# Altium PCB TFT_Adapter_Board_拼版.PcbDoc (part 8 of 9)
Units mm, origin at the board's own origin, x right, y up, seen from the top; angles counter-clockwise.
Board outline 137 x 166.56 mm, 2 copper layers (Top Layer, Bottom Layer); 80 components, 32 nets, 2615 pads, 0 vias.
Unrouted connection lines stored in the file: 1248.
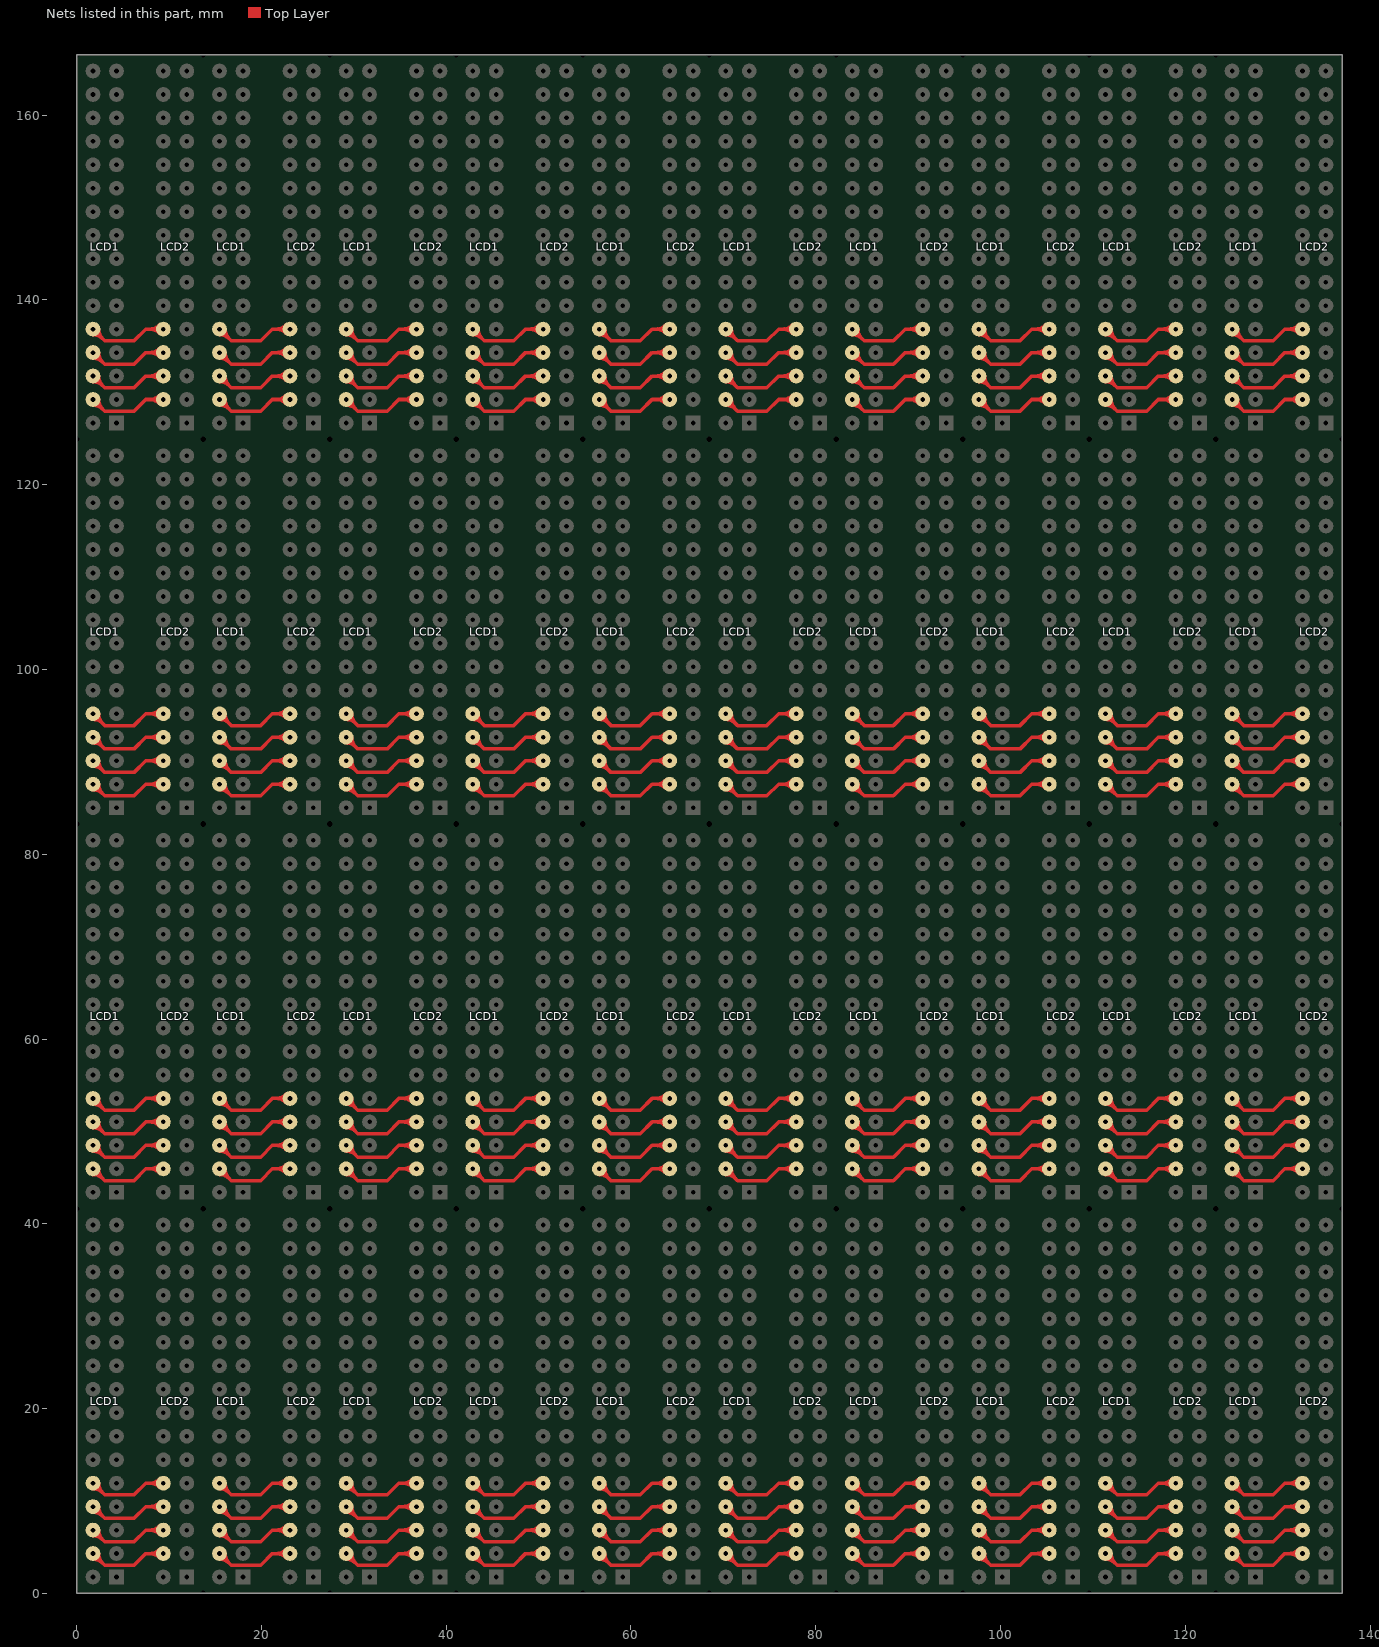
[diagram p8: the nets of this part, all layers, seen from the top]

## Nets (pads, with @x,y where several pads share a name; then routed paths per layer and width w, separated by ;. In a path a pad name is that pad's centre, name@x,y a point inside that pad or via, vN(x,y) a via of type N, cw(c..) or ccw(c..) an arc to the next point about the centre after c; other vN are vias at no path point) (continued)
NetLCD1_28: LCD1.28 LCD2.28 | length 531.8
  Top Layer w0.381: LCD1.28@1.77,11.321 cw(c1.77,9.849) 2.81,10.89 cw(c3.851,11.93) LCD1.28@2.379,11.93 ; LCD1.28@1.77,11.93 3.04,10.66 6.215,10.66 7.485,11.93 LCD2.28@9.39,11.93 ; LCD1.28@1.77,52.96 cw(c1.77,51.489) 2.81,52.53 cw(c3.851,53.57) LCD1.28@2.379,53.57 ; LCD1.28@1.77,53.57 3.04,52.3 6.215,52.3 7.485,53.57 LCD2.28@9.39,53.57 ; LCD1.28@1.77,94.6 cw(c1.77,93.129) 2.81,94.17 cw(c3.851,95.21) LCD1.28@2.379,95.21 ; LCD1.28@1.77,95.21 3.04,93.94 6.215,93.94 7.485,95.21 LCD2.28@9.39,95.21 ; LCD1.28@1.77,136.24 cw(c1.77,134.769) 2.81,135.81 cw(c3.851,136.85) LCD1.28@2.379,136.85 ; LCD1.28@1.77,136.85 3.04,135.58 6.215,135.58 7.485,136.85 LCD2.28@9.39,136.85 ; LCD2.28@8.959,11.499 ccw(c7.919,10.459) 7.919,11.93 ccw(c7.919,13.401) LCD2.28@8.959,12.361 ; LCD2.28@8.959,53.139 ccw(c7.919,52.099) 7.919,53.57 ccw(c7.919,55.041) LCD2.28@8.959,54.001 ; LCD2.28@8.959,94.779 ccw(c7.919,93.739) 7.919,95.21 ccw(c7.919,96.681) LCD2.28@8.959,95.641 ; LCD2.28@8.959,136.419 ccw(c7.919,135.379) 7.919,136.85 ccw(c7.919,138.321) LCD2.28@8.959,137.281 ; LCD1.28@15.47,11.321 cw(c15.47,9.849) 16.51,10.89 cw(c17.551,11.93) LCD1.28@16.079,11.93 ; LCD1.28@15.47,11.93 16.74,10.66 19.915,10.66 21.185,11.93 LCD2.28@23.09,11.93 ; LCD1.28@15.47,52.96 cw(c15.47,51.489) 16.51,52.53 cw(c17.551,53.57) LCD1.28@16.079,53.57 ; LCD1.28@15.47,53.57 16.74,52.3 19.915,52.3 21.185,53.57 LCD2.28@23.09,53.57 ; LCD1.28@15.47,94.6 cw(c15.47,93.129) 16.51,94.17 cw(c17.551,95.21) LCD1.28@16.079,95.21 ; LCD1.28@15.47,95.21 16.74,93.94 19.915,93.94 21.185,95.21 LCD2.28@23.09,95.21 ; LCD1.28@15.47,136.24 cw(c15.47,134.769) 16.51,135.81 cw(c17.551,136.85) LCD1.28@16.079,136.85 ; LCD1.28@15.47,136.85 16.74,135.58 19.915,135.58 21.185,136.85 LCD2.28@23.09,136.85 ; LCD2.28@22.659,11.499 ccw(c21.619,10.459) 21.619,11.93 ccw(c21.619,13.401) LCD2.28@22.659,12.361 ; LCD2.28@22.659,53.139 ccw(c21.619,52.099) 21.619,53.57 ccw(c21.619,55.041) LCD2.28@22.659,54.001 ; LCD2.28@22.659,94.779 ccw(c21.619,93.739) 21.619,95.21 ccw(c21.619,96.681) LCD2.28@22.659,95.641 ; LCD2.28@22.659,136.419 ccw(c21.619,135.379) 21.619,136.85 ccw(c21.619,138.321) LCD2.28@22.659,137.281 ; LCD1.28@29.17,11.321 cw(c29.17,9.849) 30.21,10.89 cw(c31.251,11.93) LCD1.28@29.779,11.93 ; LCD1.28@29.17,11.93 30.44,10.66 33.615,10.66 34.885,11.93 LCD2.28@36.79,11.93 ; LCD1.28@29.17,52.96 cw(c29.17,51.489) 30.21,52.53 cw(c31.251,53.57) LCD1.28@29.779,53.57 ; LCD1.28@29.17,53.57 30.44,52.3 33.615,52.3 34.885,53.57 LCD2.28@36.79,53.57 ; LCD1.28@29.17,94.6 cw(c29.17,93.129) 30.21,94.17 cw(c31.251,95.21) LCD1.28@29.779,95.21 ; LCD1.28@29.17,95.21 30.44,93.94 33.615,93.94 34.885,95.21 LCD2.28@36.79,95.21 ; LCD1.28@29.17,136.24 cw(c29.17,134.769) 30.21,135.81 cw(c31.251,136.85) LCD1.28@29.779,136.85 ; LCD1.28@29.17,136.85 30.44,135.58 33.615,135.58 34.885,136.85 LCD2.28@36.79,136.85 ; LCD2.28@36.359,11.499 ccw(c35.319,10.459) 35.319,11.93 ccw(c35.319,13.401) LCD2.28@36.359,12.361 ; LCD2.28@36.359,53.139 ccw(c35.319,52.099) 35.319,53.57 ccw(c35.319,55.041) LCD2.28@36.359,54.001 ; LCD2.28@36.359,94.779 ccw(c35.319,93.739) 35.319,95.21 ccw(c35.319,96.681) LCD2.28@36.359,95.641 ; LCD2.28@36.359,136.419 ccw(c35.319,135.379) 35.319,136.85 ccw(c35.319,138.321) LCD2.28@36.359,137.281 ; LCD1.28@42.87,11.321 cw(c42.87,9.849) 43.91,10.89 cw(c44.951,11.93) LCD1.28@43.479,11.93 ; LCD1.28@42.87,11.93 44.14,10.66 47.315,10.66 48.585,11.93 LCD2.28@50.49,11.93 ; LCD1.28@42.87,52.96 cw(c42.87,51.489) 43.91,52.53 cw(c44.951,53.57) LCD1.28@43.479,53.57 ; LCD1.28@42.87,53.57 44.14,52.3 47.315,52.3 48.585,53.57 LCD2.28@50.49,53.57 ; LCD1.28@42.87,94.6 cw(c42.87,93.129) 43.91,94.17 cw(c44.951,95.21) LCD1.28@43.479,95.21 ; LCD1.28@42.87,95.21 44.14,93.94 47.315,93.94 48.585,95.21 LCD2.28@50.49,95.21 ; LCD1.28@42.87,136.24 cw(c42.87,134.769) 43.91,135.81 cw(c44.951,136.85) LCD1.28@43.479,136.85 ; LCD1.28@42.87,136.85 44.14,135.58 47.315,135.58 48.585,136.85 LCD2.28@50.49,136.85 ; LCD2.28@50.059,11.499 ccw(c49.019,10.459) 49.019,11.93 ccw(c49.019,13.401) LCD2.28@50.059,12.361 ; LCD2.28@50.059,53.139 ccw(c49.019,52.099) 49.019,53.57 ccw(c49.019,55.041) LCD2.28@50.059,54.001 ; LCD2.28@50.059,94.779 ccw(c49.019,93.739) 49.019,95.21 ccw(c49.019,96.681) LCD2.28@50.059,95.641 ; LCD2.28@50.059,136.419 ccw(c49.019,135.379) 49.019,136.85 ccw(c49.019,138.321) LCD2.28@50.059,137.281 ; LCD1.28@56.57,11.321 cw(c56.57,9.849) 57.61,10.89 cw(c58.651,11.93) LCD1.28@57.179,11.93 ; LCD1.28@56.57,11.93 57.84,10.66 61.015,10.66 62.285,11.93 LCD2.28@64.19,11.93 ; LCD1.28@56.57,52.96 cw(c56.57,51.489) 57.61,52.53 cw(c58.651,53.57) LCD1.28@57.179,53.57 ; LCD1.28@56.57,53.57 57.84,52.3 61.015,52.3 62.285,53.57 LCD2.28@64.19,53.57 ; LCD1.28@56.57,94.6 cw(c56.57,93.129) 57.61,94.17 cw(c58.651,95.21) LCD1.28@57.179,95.21 ; LCD1.28@56.57,95.21 57.84,93.94 61.015,93.94 62.285,95.21 LCD2.28@64.19,95.21 ; LCD1.28@56.57,136.24 cw(c56.57,134.769) 57.61,135.81 cw(c58.651,136.85) LCD1.28@57.179,136.85 ; LCD1.28@56.57,136.85 57.84,135.58 61.015,135.58 62.285,136.85 LCD2.28@64.19,136.85 ; LCD2.28@63.759,11.499 ccw(c62.719,10.459) 62.719,11.93 ccw(c62.719,13.401) LCD2.28@63.759,12.361 ; LCD2.28@63.759,53.139 ccw(c62.719,52.099) 62.719,53.57 ccw(c62.719,55.041) LCD2.28@63.759,54.001 ; LCD2.28@63.759,94.779 ccw(c62.719,93.739) 62.719,95.21 ccw(c62.719,96.681) LCD2.28@63.759,95.641 ; LCD2.28@63.759,136.419 ccw(c62.719,135.379) 62.719,136.85 ccw(c62.719,138.321) LCD2.28@63.759,137.281 ; LCD1.28@70.27,11.321 cw(c70.27,9.849) 71.31,10.89 cw(c72.351,11.93) LCD1.28@70.879,11.93 ; LCD1.28@70.27,11.93 71.54,10.66 74.715,10.66 75.985,11.93 LCD2.28@77.89,11.93 ; LCD1.28@70.27,52.96 cw(c70.27,51.489) 71.31,52.53 cw(c72.351,53.57) LCD1.28@70.879,53.57 ; LCD1.28@70.27,53.57 71.54,52.3 74.715,52.3 75.985,53.57 LCD2.28@77.89,53.57 ; LCD1.28@70.27,94.6 cw(c70.27,93.129) 71.31,94.17 cw(c72.351,95.21) LCD1.28@70.879,95.21 ; LCD1.28@70.27,95.21 71.54,93.94 74.715,93.94 75.985,95.21 LCD2.28@77.89,95.21 ; LCD1.28@70.27,136.24 cw(c70.27,134.769) 71.31,135.81 cw(c72.351,136.85) LCD1.28@70.879,136.85 ; LCD1.28@70.27,136.85 71.54,135.58 74.715,135.58 75.985,136.85 LCD2.28@77.89,136.85 ; LCD2.28@77.459,11.499 ccw(c76.419,10.459) 76.419,11.93 ccw(c76.419,13.401) LCD2.28@77.459,12.361 ; LCD2.28@77.459,53.139 ccw(c76.419,52.099) 76.419,53.57 ccw(c76.419,55.041) LCD2.28@77.459,54.001 ; LCD2.28@77.459,94.779 ccw(c76.419,93.739) 76.419,95.21 ccw(c76.419,96.681) LCD2.28@77.459,95.641 ; LCD2.28@77.459,136.419 ccw(c76.419,135.379) 76.419,136.85 ccw(c76.419,138.321) LCD2.28@77.459,137.281 ; LCD1.28@83.97,11.321 cw(c83.97,9.849) 85.01,10.89 cw(c86.051,11.93) LCD1.28@84.579,11.93 ; LCD1.28@83.97,11.93 85.24,10.66 88.415,10.66 89.685,11.93 LCD2.28@91.59,11.93 ; LCD1.28@83.97,52.96 cw(c83.97,51.489) 85.01,52.53 cw(c86.051,53.57) LCD1.28@84.579,53.57 ; LCD1.28@83.97,53.57 85.24,52.3 88.415,52.3 89.685,53.57 LCD2.28@91.59,53.57 ; LCD1.28@83.97,94.6 cw(c83.97,93.129) 85.01,94.17 cw(c86.051,95.21) LCD1.28@84.579,95.21 ; LCD1.28@83.97,95.21 85.24,93.94 88.415,93.94 89.685,95.21 LCD2.28@91.59,95.21 ; LCD1.28@83.97,136.24 cw(c83.97,134.769) 85.01,135.81 cw(c86.051,136.85) LCD1.28@84.579,136.85 ; LCD1.28@83.97,136.85 85.24,135.58 88.415,135.58 89.685,136.85 LCD2.28@91.59,136.85 ; LCD2.28@91.159,11.499 ccw(c90.119,10.459) 90.119,11.93 ccw(c90.119,13.401) LCD2.28@91.159,12.361 ; LCD2.28@91.159,53.139 ccw(c90.119,52.099) 90.119,53.57 ccw(c90.119,55.041) LCD2.28@91.159,54.001 ; LCD2.28@91.159,94.779 ccw(c90.119,93.739) 90.119,95.21 ccw(c90.119,96.681) LCD2.28@91.159,95.641 ; LCD2.28@91.159,136.419 ccw(c90.119,135.379) 90.119,136.85 ccw(c90.119,138.321) LCD2.28@91.159,137.281 ; LCD1.28@97.67,11.321 cw(c97.67,9.849) 98.71,10.89 cw(c99.751,11.93) LCD1.28@98.279,11.93 ; LCD1.28@97.67,11.93 98.94,10.66 102.115,10.66 103.385,11.93 LCD2.28@105.29,11.93 ; LCD1.28@97.67,52.96 cw(c97.67,51.489) 98.71,52.53 cw(c99.751,53.57) LCD1.28@98.279,53.57 ; LCD1.28@97.67,53.57 98.94,52.3 102.115,52.3 103.385,53.57 LCD2.28@105.29,53.57 ; LCD1.28@97.67,94.6 cw(c97.67,93.129) 98.71,94.17 cw(c99.751,95.21) LCD1.28@98.279,95.21 ; LCD1.28@97.67,95.21 98.94,93.94 102.115,93.94 103.385,95.21 LCD2.28@105.29,95.21 ; LCD1.28@97.67,136.24 cw(c97.67,134.769) 98.71,135.81 cw(c99.751,136.85) LCD1.28@98.279,136.85 ; LCD1.28@97.67,136.85 98.94,135.58 102.115,135.58 103.385,136.85 LCD2.28@105.29,136.85 ; LCD2.28@104.859,11.499 ccw(c103.819,10.459) 103.819,11.93 ccw(c103.819,13.401) LCD2.28@104.859,12.361 ; LCD2.28@104.859,53.139 ccw(c103.819,52.099) 103.819,53.57 ccw(c103.819,55.041) LCD2.28@104.859,54.001 ; LCD2.28@104.859,94.779 ccw(c103.819,93.739) 103.819,95.21 ccw(c103.819,96.681) LCD2.28@104.859,95.641 ; LCD2.28@104.859,136.419 ccw(c103.819,135.379) 103.819,136.85 ccw(c103.819,138.321) LCD2.28@104.859,137.281 ; LCD1.28@111.37,11.321 cw(c111.37,9.849) 112.41,10.89 cw(c113.451,11.93) LCD1.28@111.979,11.93 ; LCD1.28@111.37,11.93 112.64,10.66 115.815,10.66 117.085,11.93 LCD2.28@118.99,11.93 ; LCD1.28@111.37,52.96 cw(c111.37,51.489) 112.41,52.53 cw(c113.451,53.57) LCD1.28@111.979,53.57 ; LCD1.28@111.37,53.57 112.64,52.3 115.815,52.3 117.085,53.57 LCD2.28@118.99,53.57 ; LCD1.28@111.37,94.6 cw(c111.37,93.129) 112.41,94.17 cw(c113.451,95.21) LCD1.28@111.979,95.21 ; LCD1.28@111.37,95.21 112.64,93.94 115.815,93.94 117.085,95.21 LCD2.28@118.99,95.21 ; LCD1.28@111.37,136.24 cw(c111.37,134.769) 112.41,135.81 cw(c113.451,136.85) LCD1.28@111.979,136.85 ; LCD1.28@111.37,136.85 112.64,135.58 115.815,135.58 117.085,136.85 LCD2.28@118.99,136.85 ; LCD2.28@118.559,11.499 ccw(c117.519,10.459) 117.519,11.93 ccw(c117.519,13.401) LCD2.28@118.559,12.361 ; LCD2.28@118.559,53.139 ccw(c117.519,52.099) 117.519,53.57 ccw(c117.519,55.041) LCD2.28@118.559,54.001 ; LCD2.28@118.559,94.779 ccw(c117.519,93.739) 117.519,95.21 ccw(c117.519,96.681) LCD2.28@118.559,95.641 ; LCD2.28@118.559,136.419 ccw(c117.519,135.379) 117.519,136.85 ccw(c117.519,138.321) LCD2.28@118.559,137.281 ; LCD1.28@125.07,11.321 cw(c125.07,9.849) 126.11,10.89 cw(c127.151,11.93) LCD1.28@125.679,11.93 ; LCD1.28@125.07,11.93 126.34,10.66 129.515,10.66 130.785,11.93 LCD2.28@132.69,11.93 ; LCD1.28@125.07,52.96 cw(c125.07,51.489) 126.11,52.53 cw(c127.151,53.57) LCD1.28@125.679,53.57 ; LCD1.28@125.07,53.57 126.34,52.3 129.515,52.3 130.785,53.57 LCD2.28@132.69,53.57 ; LCD1.28@125.07,94.6 cw(c125.07,93.129) 126.11,94.17 cw(c127.151,95.21) LCD1.28@125.679,95.21 ; LCD1.28@125.07,95.21 126.34,93.94 129.515,93.94 130.785,95.21 LCD2.28@132.69,95.21 ; LCD1.28@125.07,136.24 cw(c125.07,134.769) 126.11,135.81 cw(c127.151,136.85) LCD1.28@125.679,136.85 ; LCD1.28@125.07,136.85 126.34,135.58 129.515,135.58 130.785,136.85 LCD2.28@132.69,136.85 ; LCD2.28@132.259,11.499 ccw(c131.219,10.459) 131.219,11.93 ccw(c131.219,13.401) LCD2.28@132.259,12.361 ; LCD2.28@132.259,53.139 ccw(c131.219,52.099) 131.219,53.57 ccw(c131.219,55.041) LCD2.28@132.259,54.001 ; LCD2.28@132.259,94.779 ccw(c131.219,93.739) 131.219,95.21 ccw(c131.219,96.681) LCD2.28@132.259,95.641 ; LCD2.28@132.259,136.419 ccw(c131.219,135.379) 131.219,136.85 ccw(c131.219,138.321) LCD2.28@132.259,137.281
NetLCD1_29: LCD1.29 LCD2.29 | length 531.8
  Top Layer w0.381: LCD1.29@1.77,8.781 cw(c1.77,7.309) 2.81,8.35 cw(c3.851,9.39) LCD1.29@2.379,9.39 ; LCD1.29@1.77,9.39 3.04,8.12 6.215,8.12 7.485,9.39 LCD2.29@9.39,9.39 ; LCD1.29@1.77,50.42 cw(c1.77,48.949) 2.81,49.99 cw(c3.851,51.03) LCD1.29@2.379,51.03 ; LCD1.29@1.77,51.03 3.04,49.76 6.215,49.76 7.485,51.03 LCD2.29@9.39,51.03 ; LCD1.29@1.77,92.06 cw(c1.77,90.589) 2.81,91.63 cw(c3.851,92.67) LCD1.29@2.379,92.67 ; LCD1.29@1.77,92.67 3.04,91.4 6.215,91.4 7.485,92.67 LCD2.29@9.39,92.67 ; LCD1.29@1.77,133.7 cw(c1.77,132.229) 2.81,133.27 cw(c3.851,134.31) LCD1.29@2.379,134.31 ; LCD1.29@1.77,134.31 3.04,133.04 6.215,133.04 7.485,134.31 LCD2.29@9.39,134.31 ; LCD2.29@8.959,8.959 ccw(c7.919,7.919) 7.919,9.39 ccw(c7.919,10.861) LCD2.29@8.959,9.821 ; LCD2.29@8.959,50.599 ccw(c7.919,49.559) 7.919,51.03 ccw(c7.919,52.501) LCD2.29@8.959,51.461 ; LCD2.29@8.959,92.239 ccw(c7.919,91.199) 7.919,92.67 ccw(c7.919,94.141) LCD2.29@8.959,93.101 ; LCD2.29@8.959,133.879 ccw(c7.919,132.839) 7.919,134.31 ccw(c7.919,135.781) LCD2.29@8.959,134.741 ; LCD1.29@15.47,8.781 cw(c15.47,7.309) 16.51,8.35 cw(c17.551,9.39) LCD1.29@16.079,9.39 ; LCD1.29@15.47,9.39 16.74,8.12 19.915,8.12 21.185,9.39 LCD2.29@23.09,9.39 ; LCD1.29@15.47,50.42 cw(c15.47,48.949) 16.51,49.99 cw(c17.551,51.03) LCD1.29@16.079,51.03 ; LCD1.29@15.47,51.03 16.74,49.76 19.915,49.76 21.185,51.03 LCD2.29@23.09,51.03 ; LCD1.29@15.47,92.06 cw(c15.47,90.589) 16.51,91.63 cw(c17.551,92.67) LCD1.29@16.079,92.67 ; LCD1.29@15.47,92.67 16.74,91.4 19.915,91.4 21.185,92.67 LCD2.29@23.09,92.67 ; LCD1.29@15.47,133.7 cw(c15.47,132.229) 16.51,133.27 cw(c17.551,134.31) LCD1.29@16.079,134.31 ; LCD1.29@15.47,134.31 16.74,133.04 19.915,133.04 21.185,134.31 LCD2.29@23.09,134.31 ; LCD2.29@22.659,8.959 ccw(c21.619,7.919) 21.619,9.39 ccw(c21.619,10.861) LCD2.29@22.659,9.821 ; LCD2.29@22.659,50.599 ccw(c21.619,49.559) 21.619,51.03 ccw(c21.619,52.501) LCD2.29@22.659,51.461 ; LCD2.29@22.659,92.239 ccw(c21.619,91.199) 21.619,92.67 ccw(c21.619,94.141) LCD2.29@22.659,93.101 ; LCD2.29@22.659,133.879 ccw(c21.619,132.839) 21.619,134.31 ccw(c21.619,135.781) LCD2.29@22.659,134.741 ; LCD1.29@29.17,8.781 cw(c29.17,7.309) 30.21,8.35 cw(c31.251,9.39) LCD1.29@29.779,9.39 ; LCD1.29@29.17,9.39 30.44,8.12 33.615,8.12 34.885,9.39 LCD2.29@36.79,9.39 ; LCD1.29@29.17,50.42 cw(c29.17,48.949) 30.21,49.99 cw(c31.251,51.03) LCD1.29@29.779,51.03 ; LCD1.29@29.17,51.03 30.44,49.76 33.615,49.76 34.885,51.03 LCD2.29@36.79,51.03 ; LCD1.29@29.17,92.06 cw(c29.17,90.589) 30.21,91.63 cw(c31.251,92.67) LCD1.29@29.779,92.67 ; LCD1.29@29.17,92.67 30.44,91.4 33.615,91.4 34.885,92.67 LCD2.29@36.79,92.67 ; LCD1.29@29.17,133.7 cw(c29.17,132.229) 30.21,133.27 cw(c31.251,134.31) LCD1.29@29.779,134.31 ; LCD1.29@29.17,134.31 30.44,133.04 33.615,133.04 34.885,134.31 LCD2.29@36.79,134.31 ; LCD2.29@36.359,8.959 ccw(c35.319,7.919) 35.319,9.39 ccw(c35.319,10.861) LCD2.29@36.359,9.821 ; LCD2.29@36.359,50.599 ccw(c35.319,49.559) 35.319,51.03 ccw(c35.319,52.501) LCD2.29@36.359,51.461 ; LCD2.29@36.359,92.239 ccw(c35.319,91.199) 35.319,92.67 ccw(c35.319,94.141) LCD2.29@36.359,93.101 ; LCD2.29@36.359,133.879 ccw(c35.319,132.839) 35.319,134.31 ccw(c35.319,135.781) LCD2.29@36.359,134.741 ; LCD1.29@42.87,8.781 cw(c42.87,7.309) 43.91,8.35 cw(c44.951,9.39) LCD1.29@43.479,9.39 ; LCD1.29@42.87,9.39 44.14,8.12 47.315,8.12 48.585,9.39 LCD2.29@50.49,9.39 ; LCD1.29@42.87,50.42 cw(c42.87,48.949) 43.91,49.99 cw(c44.951,51.03) LCD1.29@43.479,51.03 ; LCD1.29@42.87,51.03 44.14,49.76 47.315,49.76 48.585,51.03 LCD2.29@50.49,51.03 ; LCD1.29@42.87,92.06 cw(c42.87,90.589) 43.91,91.63 cw(c44.951,92.67) LCD1.29@43.479,92.67 ; LCD1.29@42.87,92.67 44.14,91.4 47.315,91.4 48.585,92.67 LCD2.29@50.49,92.67 ; LCD1.29@42.87,133.7 cw(c42.87,132.229) 43.91,133.27 cw(c44.951,134.31) LCD1.29@43.479,134.31 ; LCD1.29@42.87,134.31 44.14,133.04 47.315,133.04 48.585,134.31 LCD2.29@50.49,134.31 ; LCD2.29@50.059,8.959 ccw(c49.019,7.919) 49.019,9.39 ccw(c49.019,10.861) LCD2.29@50.059,9.821 ; LCD2.29@50.059,50.599 ccw(c49.019,49.559) 49.019,51.03 ccw(c49.019,52.501) LCD2.29@50.059,51.461 ; LCD2.29@50.059,92.239 ccw(c49.019,91.199) 49.019,92.67 ccw(c49.019,94.141) LCD2.29@50.059,93.101 ; LCD2.29@50.059,133.879 ccw(c49.019,132.839) 49.019,134.31 ccw(c49.019,135.781) LCD2.29@50.059,134.741 ; LCD1.29@56.57,8.781 cw(c56.57,7.309) 57.61,8.35 cw(c58.651,9.39) LCD1.29@57.179,9.39 ; LCD1.29@56.57,9.39 57.84,8.12 61.015,8.12 62.285,9.39 LCD2.29@64.19,9.39 ; LCD1.29@56.57,50.42 cw(c56.57,48.949) 57.61,49.99 cw(c58.651,51.03) LCD1.29@57.179,51.03 ; LCD1.29@56.57,51.03 57.84,49.76 61.015,49.76 62.285,51.03 LCD2.29@64.19,51.03 ; LCD1.29@56.57,92.06 cw(c56.57,90.589) 57.61,91.63 cw(c58.651,92.67) LCD1.29@57.179,92.67 ; LCD1.29@56.57,92.67 57.84,91.4 61.015,91.4 62.285,92.67 LCD2.29@64.19,92.67 ; LCD1.29@56.57,133.7 cw(c56.57,132.229) 57.61,133.27 cw(c58.651,134.31) LCD1.29@57.179,134.31 ; LCD1.29@56.57,134.31 57.84,133.04 61.015,133.04 62.285,134.31 LCD2.29@64.19,134.31 ; LCD2.29@63.759,8.959 ccw(c62.719,7.919) 62.719,9.39 ccw(c62.719,10.861) LCD2.29@63.759,9.821 ; LCD2.29@63.759,50.599 ccw(c62.719,49.559) 62.719,51.03 ccw(c62.719,52.501) LCD2.29@63.759,51.461 ; LCD2.29@63.759,92.239 ccw(c62.719,91.199) 62.719,92.67 ccw(c62.719,94.141) LCD2.29@63.759,93.101 ; LCD2.29@63.759,133.879 ccw(c62.719,132.839) 62.719,134.31 ccw(c62.719,135.781) LCD2.29@63.759,134.741 ; LCD1.29@70.27,8.781 cw(c70.27,7.309) 71.31,8.35 cw(c72.351,9.39) LCD1.29@70.879,9.39 ; LCD1.29@70.27,9.39 71.54,8.12 74.715,8.12 75.985,9.39 LCD2.29@77.89,9.39 ; LCD1.29@70.27,50.42 cw(c70.27,48.949) 71.31,49.99 cw(c72.351,51.03) LCD1.29@70.879,51.03 ; LCD1.29@70.27,51.03 71.54,49.76 74.715,49.76 75.985,51.03 LCD2.29@77.89,51.03 ; LCD1.29@70.27,92.06 cw(c70.27,90.589) 71.31,91.63 cw(c72.351,92.67) LCD1.29@70.879,92.67 ; LCD1.29@70.27,92.67 71.54,91.4 74.715,91.4 75.985,92.67 LCD2.29@77.89,92.67 ; LCD1.29@70.27,133.7 cw(c70.27,132.229) 71.31,133.27 cw(c72.351,134.31) LCD1.29@70.879,134.31 ; LCD1.29@70.27,134.31 71.54,133.04 74.715,133.04 75.985,134.31 LCD2.29@77.89,134.31 ; LCD2.29@77.459,8.959 ccw(c76.419,7.919) 76.419,9.39 ccw(c76.419,10.861) LCD2.29@77.459,9.821 ; LCD2.29@77.459,50.599 ccw(c76.419,49.559) 76.419,51.03 ccw(c76.419,52.501) LCD2.29@77.459,51.461 ; LCD2.29@77.459,92.239 ccw(c76.419,91.199) 76.419,92.67 ccw(c76.419,94.141) LCD2.29@77.459,93.101 ; LCD2.29@77.459,133.879 ccw(c76.419,132.839) 76.419,134.31 ccw(c76.419,135.781) LCD2.29@77.459,134.741 ; LCD1.29@83.97,8.781 cw(c83.97,7.309) 85.01,8.35 cw(c86.051,9.39) LCD1.29@84.579,9.39 ; LCD1.29@83.97,9.39 85.24,8.12 88.415,8.12 89.685,9.39 LCD2.29@91.59,9.39 ; LCD1.29@83.97,50.42 cw(c83.97,48.949) 85.01,49.99 cw(c86.051,51.03) LCD1.29@84.579,51.03 ; LCD1.29@83.97,51.03 85.24,49.76 88.415,49.76 89.685,51.03 LCD2.29@91.59,51.03 ; LCD1.29@83.97,92.06 cw(c83.97,90.589) 85.01,91.63 cw(c86.051,92.67) LCD1.29@84.579,92.67 ; LCD1.29@83.97,92.67 85.24,91.4 88.415,91.4 89.685,92.67 LCD2.29@91.59,92.67 ; LCD1.29@83.97,133.7 cw(c83.97,132.229) 85.01,133.27 cw(c86.051,134.31) LCD1.29@84.579,134.31 ; LCD1.29@83.97,134.31 85.24,133.04 88.415,133.04 89.685,134.31 LCD2.29@91.59,134.31 ; LCD2.29@91.159,8.959 ccw(c90.119,7.919) 90.119,9.39 ccw(c90.119,10.861) LCD2.29@91.159,9.821 ; LCD2.29@91.159,50.599 ccw(c90.119,49.559) 90.119,51.03 ccw(c90.119,52.501) LCD2.29@91.159,51.461 ; LCD2.29@91.159,92.239 ccw(c90.119,91.199) 90.119,92.67 ccw(c90.119,94.141) LCD2.29@91.159,93.101 ; LCD2.29@91.159,133.879 ccw(c90.119,132.839) 90.119,134.31 ccw(c90.119,135.781) LCD2.29@91.159,134.741 ; LCD1.29@97.67,8.781 cw(c97.67,7.309) 98.71,8.35 cw(c99.751,9.39) LCD1.29@98.279,9.39 ; LCD1.29@97.67,9.39 98.94,8.12 102.115,8.12 103.385,9.39 LCD2.29@105.29,9.39 ; LCD1.29@97.67,50.42 cw(c97.67,48.949) 98.71,49.99 cw(c99.751,51.03) LCD1.29@98.279,51.03 ; LCD1.29@97.67,51.03 98.94,49.76 102.115,49.76 103.385,51.03 LCD2.29@105.29,51.03 ; LCD1.29@97.67,92.06 cw(c97.67,90.589) 98.71,91.63 cw(c99.751,92.67) LCD1.29@98.279,92.67 ; LCD1.29@97.67,92.67 98.94,91.4 102.115,91.4 103.385,92.67 LCD2.29@105.29,92.67 ; LCD1.29@97.67,133.7 cw(c97.67,132.229) 98.71,133.27 cw(c99.751,134.31) LCD1.29@98.279,134.31 ; LCD1.29@97.67,134.31 98.94,133.04 102.115,133.04 103.385,134.31 LCD2.29@105.29,134.31 ; LCD2.29@104.859,8.959 ccw(c103.819,7.919) 103.819,9.39 ccw(c103.819,10.861) LCD2.29@104.859,9.821 ; LCD2.29@104.859,50.599 ccw(c103.819,49.559) 103.819,51.03 ccw(c103.819,52.501) LCD2.29@104.859,51.461 ; LCD2.29@104.859,92.239 ccw(c103.819,91.199) 103.819,92.67 ccw(c103.819,94.141) LCD2.29@104.859,93.101 ; LCD2.29@104.859,133.879 ccw(c103.819,132.839) 103.819,134.31 ccw(c103.819,135.781) LCD2.29@104.859,134.741 ; LCD1.29@111.37,8.781 cw(c111.37,7.309) 112.41,8.35 cw(c113.451,9.39) LCD1.29@111.979,9.39 ; LCD1.29@111.37,9.39 112.64,8.12 115.815,8.12 117.085,9.39 LCD2.29@118.99,9.39 ; LCD1.29@111.37,50.42 cw(c111.37,48.949) 112.41,49.99 cw(c113.451,51.03) LCD1.29@111.979,51.03 ; LCD1.29@111.37,51.03 112.64,49.76 115.815,49.76 117.085,51.03 LCD2.29@118.99,51.03 ; LCD1.29@111.37,92.06 cw(c111.37,90.589) 112.41,91.63 cw(c113.451,92.67) LCD1.29@111.979,92.67 ; LCD1.29@111.37,92.67 112.64,91.4 115.815,91.4 117.085,92.67 LCD2.29@118.99,92.67 ; LCD1.29@111.37,133.7 cw(c111.37,132.229) 112.41,133.27 cw(c113.451,134.31) LCD1.29@111.979,134.31 ; LCD1.29@111.37,134.31 112.64,133.04 115.815,133.04 117.085,134.31 LCD2.29@118.99,134.31 ; LCD2.29@118.559,8.959 ccw(c117.519,7.919) 117.519,9.39 ccw(c117.519,10.861) LCD2.29@118.559,9.821 ; LCD2.29@118.559,50.599 ccw(c117.519,49.559) 117.519,51.03 ccw(c117.519,52.501) LCD2.29@118.559,51.461 ; LCD2.29@118.559,92.239 ccw(c117.519,91.199) 117.519,92.67 ccw(c117.519,94.141) LCD2.29@118.559,93.101 ; LCD2.29@118.559,133.879 ccw(c117.519,132.839) 117.519,134.31 ccw(c117.519,135.781) LCD2.29@118.559,134.741 ; LCD1.29@125.07,8.781 cw(c125.07,7.309) 126.11,8.35 cw(c127.151,9.39) LCD1.29@125.679,9.39 ; LCD1.29@125.07,9.39 126.34,8.12 129.515,8.12 130.785,9.39 LCD2.29@132.69,9.39 ; LCD1.29@125.07,50.42 cw(c125.07,48.949) 126.11,49.99 cw(c127.151,51.03) LCD1.29@125.679,51.03 ; LCD1.29@125.07,51.03 126.34,49.76 129.515,49.76 130.785,51.03 LCD2.29@132.69,51.03 ; LCD1.29@125.07,92.06 cw(c125.07,90.589) 126.11,91.63 cw(c127.151,92.67) LCD1.29@125.679,92.67 ; LCD1.29@125.07,92.67 126.34,91.4 129.515,91.4 130.785,92.67 LCD2.29@132.69,92.67 ; LCD1.29@125.07,133.7 cw(c125.07,132.229) 126.11,133.27 cw(c127.151,134.31) LCD1.29@125.679,134.31 ; LCD1.29@125.07,134.31 126.34,133.04 129.515,133.04 130.785,134.31 LCD2.29@132.69,134.31 ; LCD2.29@132.259,8.959 ccw(c131.219,7.919) 131.219,9.39 ccw(c131.219,10.861) LCD2.29@132.259,9.821 ; LCD2.29@132.259,50.599 ccw(c131.219,49.559) 131.219,51.03 ccw(c131.219,52.501) LCD2.29@132.259,51.461 ; LCD2.29@132.259,92.239 ccw(c131.219,91.199) 131.219,92.67 ccw(c131.219,94.141) LCD2.29@132.259,93.101 ; LCD2.29@132.259,133.879 ccw(c131.219,132.839) 131.219,134.31 ccw(c131.219,135.781) LCD2.29@132.259,134.741
NetLCD1_30: LCD1.30 LCD2.30 | length 531.8
  Top Layer w0.381: LCD1.30@1.77,6.241 cw(c1.77,4.769) 2.81,5.81 cw(c3.851,6.85) LCD1.30@2.379,6.85 ; LCD1.30@1.77,6.85 3.04,5.58 6.215,5.58 7.485,6.85 LCD2.30@9.39,6.85 ; LCD1.30@1.77,47.88 cw(c1.77,46.409) 2.81,47.45 cw(c3.851,48.49) LCD1.30@2.379,48.49 ; LCD1.30@1.77,48.49 3.04,47.22 6.215,47.22 7.485,48.49 LCD2.30@9.39,48.49 ; LCD1.30@1.77,89.52 cw(c1.77,88.049) 2.81,89.09 cw(c3.851,90.13) LCD1.30@2.379,90.13 ; LCD1.30@1.77,90.13 3.04,88.86 6.215,88.86 7.485,90.13 LCD2.30@9.39,90.13 ; LCD1.30@1.77,131.16 cw(c1.77,129.689) 2.81,130.73 cw(c3.851,131.77) LCD1.30@2.379,131.77 ; LCD1.30@1.77,131.77 3.04,130.5 6.215,130.5 7.485,131.77 LCD2.30@9.39,131.77 ; LCD2.30@8.959,6.419 ccw(c7.919,5.379) 7.919,6.85 ccw(c7.919,8.321) LCD2.30@8.959,7.281 ; LCD2.30@8.959,48.059 ccw(c7.919,47.019) 7.919,48.49 ccw(c7.919,49.961) LCD2.30@8.959,48.921 ; LCD2.30@8.959,89.699 ccw(c7.919,88.659) 7.919,90.13 ccw(c7.919,91.601) LCD2.30@8.959,90.561 ; LCD2.30@8.959,131.339 ccw(c7.919,130.299) 7.919,131.77 ccw(c7.919,133.241) LCD2.30@8.959,132.201 ; LCD1.30@15.47,6.241 cw(c15.47,4.769) 16.51,5.81 cw(c17.551,6.85) LCD1.30@16.079,6.85 ; LCD1.30@15.47,6.85 16.74,5.58 19.915,5.58 21.185,6.85 LCD2.30@23.09,6.85 ; LCD1.30@15.47,47.88 cw(c15.47,46.409) 16.51,47.45 cw(c17.551,48.49) LCD1.30@16.079,48.49 ; LCD1.30@15.47,48.49 16.74,47.22 19.915,47.22 21.185,48.49 LCD2.30@23.09,48.49 ; LCD1.30@15.47,89.52 cw(c15.47,88.049) 16.51,89.09 cw(c17.551,90.13) LCD1.30@16.079,90.13 ; LCD1.30@15.47,90.13 16.74,88.86 19.915,88.86 21.185,90.13 LCD2.30@23.09,90.13 ; LCD1.30@15.47,131.16 cw(c15.47,129.689) 16.51,130.73 cw(c17.551,131.77) LCD1.30@16.079,131.77 ; LCD1.30@15.47,131.77 16.74,130.5 19.915,130.5 21.185,131.77 LCD2.30@23.09,131.77 ; LCD2.30@22.659,6.419 ccw(c21.619,5.379) 21.619,6.85 ccw(c21.619,8.321) LCD2.30@22.659,7.281 ; LCD2.30@22.659,48.059 ccw(c21.619,47.019) 21.619,48.49 ccw(c21.619,49.961) LCD2.30@22.659,48.921 ; LCD2.30@22.659,89.699 ccw(c21.619,88.659) 21.619,90.13 ccw(c21.619,91.601) LCD2.30@22.659,90.561 ; LCD2.30@22.659,131.339 ccw(c21.619,130.299) 21.619,131.77 ccw(c21.619,133.241) LCD2.30@22.659,132.201 ; LCD1.30@29.17,6.241 cw(c29.17,4.769) 30.21,5.81 cw(c31.251,6.85) LCD1.30@29.779,6.85 ; LCD1.30@29.17,6.85 30.44,5.58 33.615,5.58 34.885,6.85 LCD2.30@36.79,6.85 ; LCD1.30@29.17,47.88 cw(c29.17,46.409) 30.21,47.45 cw(c31.251,48.49) LCD1.30@29.779,48.49 ; LCD1.30@29.17,48.49 30.44,47.22 33.615,47.22 34.885,48.49 LCD2.30@36.79,48.49 ; LCD1.30@29.17,89.52 cw(c29.17,88.049) 30.21,89.09 cw(c31.251,90.13) LCD1.30@29.779,90.13 ; LCD1.30@29.17,90.13 30.44,88.86 33.615,88.86 34.885,90.13 LCD2.30@36.79,90.13 ; LCD1.30@29.17,131.16 cw(c29.17,129.689) 30.21,130.73 cw(c31.251,131.77) LCD1.30@29.779,131.77 ; LCD1.30@29.17,131.77 30.44,130.5 33.615,130.5 34.885,131.77 LCD2.30@36.79,131.77 ; LCD2.30@36.359,6.419 ccw(c35.319,5.379) 35.319,6.85 ccw(c35.319,8.321) LCD2.30@36.359,7.281 ; LCD2.30@36.359,48.059 ccw(c35.319,47.019) 35.319,48.49 ccw(c35.319,49.961) LCD2.30@36.359,48.921 ; LCD2.30@36.359,89.699 ccw(c35.319,88.659) 35.319,90.13 ccw(c35.319,91.601) LCD2.30@36.359,90.561 ; LCD2.30@36.359,131.339 ccw(c35.319,130.299) 35.319,131.77 ccw(c35.319,133.241) LCD2.30@36.359,132.201 ; LCD1.30@42.87,6.241 cw(c42.87,4.769) 43.91,5.81 cw(c44.951,6.85) LCD1.30@43.479,6.85 ; LCD1.30@42.87,6.85 44.14,5.58 47.315,5.58 48.585,6.85 LCD2.30@50.49,6.85 ; LCD1.30@42.87,47.88 cw(c42.87,46.409) 43.91,47.45 cw(c44.951,48.49) LCD1.30@43.479,48.49 ; LCD1.30@42.87,48.49 44.14,47.22 47.315,47.22 48.585,48.49 LCD2.30@50.49,48.49 ; LCD1.30@42.87,89.52 cw(c42.87,88.049) 43.91,89.09 cw(c44.951,90.13) LCD1.30@43.479,90.13 ; LCD1.30@42.87,90.13 44.14,88.86 47.315,88.86 48.585,90.13 LCD2.30@50.49,90.13 ; LCD1.30@42.87,131.16 cw(c42.87,129.689) 43.91,130.73 cw(c44.951,131.77) LCD1.30@43.479,131.77 ; LCD1.30@42.87,131.77 44.14,130.5 47.315,130.5 48.585,131.77 LCD2.30@50.49,131.77 ; LCD2.30@50.059,6.419 ccw(c49.019,5.379) 49.019,6.85 ccw(c49.019,8.321) LCD2.30@50.059,7.281 ; LCD2.30@50.059,48.059 ccw(c49.019,47.019) 49.019,48.49 ccw(c49.019,49.961) LCD2.30@50.059,48.921 ; LCD2.30@50.059,89.699 ccw(c49.019,88.659) 49.019,90.13 ccw(c49.019,91.601) LCD2.30@50.059,90.561 ; LCD2.30@50.059,131.339 ccw(c49.019,130.299) 49.019,131.77 ccw(c49.019,133.241) LCD2.30@50.059,132.201 ; LCD1.30@56.57,6.241 cw(c56.57,4.769) 57.61,5.81 cw(c58.651,6.85) LCD1.30@57.179,6.85 ; LCD1.30@56.57,6.85 57.84,5.58 61.015,5.58 62.285,6.85 LCD2.30@64.19,6.85 ; LCD1.30@56.57,47.88 cw(c56.57,46.409) 57.61,47.45 cw(c58.651,48.49) LCD1.30@57.179,48.49 ; LCD1.30@56.57,48.49 57.84,47.22 61.015,47.22 62.285,48.49 LCD2.30@64.19,48.49 ; LCD1.30@56.57,89.52 cw(c56.57,88.049) 57.61,89.09 cw(c58.651,90.13) LCD1.30@57.179,90.13 ; LCD1.30@56.57,90.13 57.84,88.86 61.015,88.86 62.285,90.13 LCD2.30@64.19,90.13 ; LCD1.30@56.57,131.16 cw(c56.57,129.689) 57.61,130.73 cw(c58.651,131.77) LCD1.30@57.179,131.77 ; LCD1.30@56.57,131.77 57.84,130.5 61.015,130.5 62.285,131.77 LCD2.30@64.19,131.77 ; LCD2.30@63.759,6.419 ccw(c62.719,5.379) 62.719,6.85 ccw(c62.719,8.321) LCD2.30@63.759,7.281 ; LCD2.30@63.759,48.059 ccw(c62.719,47.019) 62.719,48.49 ccw(c62.719,49.961) LCD2.30@63.759,48.921 ; LCD2.30@63.759,89.699 ccw(c62.719,88.659) 62.719,90.13 ccw(c62.719,91.601) LCD2.30@63.759,90.561 ; LCD2.30@63.759,131.339 ccw(c62.719,130.299) 62.719,131.77 ccw(c62.719,133.241) LCD2.30@63.759,132.201 ; LCD1.30@70.27,6.241 cw(c70.27,4.769) 71.31,5.81 cw(c72.351,6.85) LCD1.30@70.879,6.85 ; LCD1.30@70.27,6.85 71.54,5.58 74.715,5.58 75.985,6.85 LCD2.30@77.89,6.85 ; LCD1.30@70.27,47.88 cw(c70.27,46.409) 71.31,47.45 cw(c72.351,48.49) LCD1.30@70.879,48.49 ; LCD1.30@70.27,48.49 71.54,47.22 74.715,47.22 75.985,48.49 LCD2.30@77.89,48.49 ; LCD1.30@70.27,89.52 cw(c70.27,88.049) 71.31,89.09 cw(c72.351,90.13) LCD1.30@70.879,90.13 ; LCD1.30@70.27,90.13 71.54,88.86 74.715,88.86 75.985,90.13 LCD2.30@77.89,90.13 ; LCD1.30@70.27,131.16 cw(c70.27,129.689) 71.31,130.73 cw(c72.351,131.77) LCD1.30@70.879,131.77 ; LCD1.30@70.27,131.77 71.54,130.5 74.715,130.5 75.985,131.77 LCD2.30@77.89,131.77 ; LCD2.30@77.459,6.419 ccw(c76.419,5.379) 76.419,6.85 ccw(c76.419,8.321) LCD2.30@77.459,7.281 ; LCD2.30@77.459,48.059 ccw(c76.419,47.019) 76.419,48.49 ccw(c76.419,49.961) LCD2.30@77.459,48.921 ; LCD2.30@77.459,89.699 ccw(c76.419,88.659) 76.419,90.13 ccw(c76.419,91.601) LCD2.30@77.459,90.561 ; LCD2.30@77.459,131.339 ccw(c76.419,130.299) 76.419,131.77 ccw(c76.419,133.241) LCD2.30@77.459,132.201 ; LCD1.30@83.97,6.241 cw(c83.97,4.769) 85.01,5.81 cw(c86.051,6.85) LCD1.30@84.579,6.85 ; LCD1.30@83.97,6.85 85.24,5.58 88.415,5.58 89.685,6.85 LCD2.30@91.59,6.85 ; LCD1.30@83.97,47.88 cw(c83.97,46.409) 85.01,47.45 cw(c86.051,48.49) LCD1.30@84.579,48.49 ; LCD1.30@83.97,48.49 85.24,47.22 88.415,47.22 89.685,48.49 LCD2.30@91.59,48.49 ; LCD1.30@83.97,89.52 cw(c83.97,88.049) 85.01,89.09 cw(c86.051,90.13) LCD1.30@84.579,90.13 ; LCD1.30@83.97,90.13 85.24,88.86 88.415,88.86 89.685,90.13 LCD2.30@91.59,90.13 ; LCD1.30@83.97,131.16 cw(c83.97,129.689) 85.01,130.73 cw(c86.051,131.77) LCD1.30@84.579,131.77 ; LCD1.30@83.97,131.77 85.24,130.5 88.415,130.5 89.685,131.77 LCD2.30@91.59,131.77 ; LCD2.30@91.159,6.419 ccw(c90.119,5.379) 90.119,6.85 ccw(c90.119,8.321) LCD2.30@91.159,7.281 ; LCD2.30@91.159,48.059 ccw(c90.119,47.019) 90.119,48.49 ccw(c90.119,49.961) LCD2.30@91.159,48.921 ; LCD2.30@91.159,89.699 ccw(c90.119,88.659) 90.119,90.13 ccw(c90.119,91.601) LCD2.30@91.159,90.561 ; LCD2.30@91.159,131.339 ccw(c90.119,130.299) 90.119,131.77 ccw(c90.119,133.241) LCD2.30@91.159,132.201 ; LCD1.30@97.67,6.241 cw(c97.67,4.769) 98.71,5.81 cw(c99.751,6.85) LCD1.30@98.279,6.85 ; LCD1.30@97.67,6.85 98.94,5.58 102.115,5.58 103.385,6.85 LCD2.30@105.29,6.85 ; LCD1.30@97.67,47.88 cw(c97.67,46.409) 98.71,47.45 cw(c99.751,48.49) LCD1.30@98.279,48.49 ; LCD1.30@97.67,48.49 98.94,47.22 102.115,47.22 103.385,48.49 LCD2.30@105.29,48.49 ; LCD1.30@97.67,89.52 cw(c97.67,88.049) 98.71,89.09 cw(c99.751,90.13) LCD1.30@98.279,90.13 ; LCD1.30@97.67,90.13 98.94,88.86 102.115,88.86 103.385,90.13 LCD2.30@105.29,90.13 ; LCD1.30@97.67,131.16 cw(c97.67,129.689) 98.71,130.73 cw(c99.751,131.77) LCD1.30@98.279,131.77 ; LCD1.30@97.67,131.77 98.94,130.5 102.115,130.5 103.385,131.77 LCD2.30@105.29,131.77 ; LCD2.30@104.859,6.419 ccw(c103.819,5.379) 103.819,6.85 ccw(c103.819,8.321) LCD2.30@104.859,7.281 ; LCD2.30@104.859,48.059 ccw(c103.819,47.019) 103.819,48.49 ccw(c103.819,49.961) LCD2.30@104.859,48.921 ; LCD2.30@104.859,89.699 ccw(c103.819,88.659) 103.819,90.13 ccw(c103.819,91.601) LCD2.30@104.859,90.561 ; LCD2.30@104.859,131.339 ccw(c103.819,130.299) 103.819,131.77 ccw(c103.819,133.241) LCD2.30@104.859,132.201 ; LCD1.30@111.37,6.241 cw(c111.37,4.769) 112.41,5.81 cw(c113.451,6.85) LCD1.30@111.979,6.85 ; LCD1.30@111.37,6.85 112.64,5.58 115.815,5.58 117.085,6.85 LCD2.30@118.99,6.85 ; LCD1.30@111.37,47.88 cw(c111.37,46.409) 112.41,47.45 cw(c113.451,48.49) LCD1.30@111.979,48.49 ; LCD1.30@111.37,48.49 112.64,47.22 115.815,47.22 117.085,48.49 LCD2.30@118.99,48.49 ; LCD1.30@111.37,89.52 cw(c111.37,88.049) 112.41,89.09 cw(c113.451,90.13) LCD1.30@111.979,90.13 ; LCD1.30@111.37,90.13 112.64,88.86 115.815,88.86 117.085,90.13 LCD2.30@118.99,90.13 ; LCD1.30@111.37,131.16 cw(c111.37,129.689) 112.41,130.73 cw(c113.451,131.77) LCD1.30@111.979,131.77 ; LCD1.30@111.37,131.77 112.64,130.5 115.815,130.5 117.085,131.77 LCD2.30@118.99,131.77 ; LCD2.30@118.559,6.419 ccw(c117.519,5.379) 117.519,6.85 ccw(c117.519,8.321) LCD2.30@118.559,7.281 ; LCD2.30@118.559,48.059 ccw(c117.519,47.019) 117.519,48.49 ccw(c117.519,49.961) LCD2.30@118.559,48.921 ; LCD2.30@118.559,89.699 ccw(c117.519,88.659) 117.519,90.13 ccw(c117.519,91.601) LCD2.30@118.559,90.561 ; LCD2.30@118.559,131.339 ccw(c117.519,130.299) 117.519,131.77 ccw(c117.519,133.241) LCD2.30@118.559,132.201 ; LCD1.30@125.07,6.241 cw(c125.07,4.769) 126.11,5.81 cw(c127.151,6.85) LCD1.30@125.679,6.85 ; LCD1.30@125.07,6.85 126.34,5.58 129.515,5.58 130.785,6.85 LCD2.30@132.69,6.85 ; LCD1.30@125.07,47.88 cw(c125.07,46.409) 126.11,47.45 cw(c127.151,48.49) LCD1.30@125.679,48.49 ; LCD1.30@125.07,48.49 126.34,47.22 129.515,47.22 130.785,48.49 LCD2.30@132.69,48.49 ; LCD1.30@125.07,89.52 cw(c125.07,88.049) 126.11,89.09 cw(c127.151,90.13) LCD1.30@125.679,90.13 ; LCD1.30@125.07,90.13 126.34,88.86 129.515,88.86 130.785,90.13 LCD2.30@132.69,90.13 ; LCD1.30@125.07,131.16 cw(c125.07,129.689) 126.11,130.73 cw(c127.151,131.77) LCD1.30@125.679,131.77 ; LCD1.30@125.07,131.77 126.34,130.5 129.515,130.5 130.785,131.77 LCD2.30@132.69,131.77 ; LCD2.30@132.259,6.419 ccw(c131.219,5.379) 131.219,6.85 ccw(c131.219,8.321) LCD2.30@132.259,7.281 ; LCD2.30@132.259,48.059 ccw(c131.219,47.019) 131.219,48.49 ccw(c131.219,49.961) LCD2.30@132.259,48.921 ; LCD2.30@132.259,89.699 ccw(c131.219,88.659) 131.219,90.13 ccw(c131.219,91.601) LCD2.30@132.259,90.561 ; LCD2.30@132.259,131.339 ccw(c131.219,130.299) 131.219,131.77 ccw(c131.219,133.241) LCD2.30@132.259,132.201
NetLCD1_31: LCD1.31 LCD2.31 | length 531.8
  Top Layer w0.381: LCD1.31@1.77,3.701 cw(c1.77,2.229) 2.81,3.27 cw(c3.851,4.31) LCD1.31@2.379,4.31 ; LCD1.31@1.77,4.31 3.04,3.04 6.215,3.04 7.485,4.31 LCD2.31@9.39,4.31 ; LCD1.31@1.77,45.34 cw(c1.77,43.869) 2.81,44.91 cw(c3.851,45.95) LCD1.31@2.379,45.95 ; LCD1.31@1.77,45.95 3.04,44.68 6.215,44.68 7.485,45.95 LCD2.31@9.39,45.95 ; LCD1.31@1.77,86.98 cw(c1.77,85.509) 2.81,86.55 cw(c3.851,87.59) LCD1.31@2.379,87.59 ; LCD1.31@1.77,87.59 3.04,86.32 6.215,86.32 7.485,87.59 LCD2.31@9.39,87.59 ; LCD1.31@1.77,128.62 cw(c1.77,127.149) 2.81,128.19 cw(c3.851,129.23) LCD1.31@2.379,129.23 ; LCD1.31@1.77,129.23 3.04,127.96 6.215,127.96 7.485,129.23 LCD2.31@9.39,129.23 ; LCD2.31@8.959,3.879 ccw(c7.919,2.839) 7.919,4.31 ccw(c7.919,5.781) LCD2.31@8.959,4.741 ; LCD2.31@8.959,45.519 ccw(c7.919,44.479) 7.919,45.95 ccw(c7.919,47.421) LCD2.31@8.959,46.381 ; LCD2.31@8.959,87.159 ccw(c7.919,86.119) 7.919,87.59 ccw(c7.919,89.061) LCD2.31@8.959,88.021 ; LCD2.31@8.959,128.799 ccw(c7.919,127.759) 7.919,129.23 ccw(c7.919,130.701) LCD2.31@8.959,129.661 ; LCD1.31@15.47,3.701 cw(c15.47,2.229) 16.51,3.27 cw(c17.551,4.31) LCD1.31@16.079,4.31 ; LCD1.31@15.47,4.31 16.74,3.04 19.915,3.04 21.185,4.31 LCD2.31@23.09,4.31 ; LCD1.31@15.47,45.34 cw(c15.47,43.869) 16.51,44.91 cw(c17.551,45.95) LCD1.31@16.079,45.95 ; LCD1.31@15.47,45.95 16.74,44.68 19.915,44.68 21.185,45.95 LCD2.31@23.09,45.95 ; LCD1.31@15.47,86.98 cw(c15.47,85.509) 16.51,86.55 cw(c17.551,87.59) LCD1.31@16.079,87.59 ; LCD1.31@15.47,87.59 16.74,86.32 19.915,86.32 21.185,87.59 LCD2.31@23.09,87.59 ; LCD1.31@15.47,128.62 cw(c15.47,127.149) 16.51,128.19 cw(c17.551,129.23) LCD1.31@16.079,129.23 ; LCD1.31@15.47,129.23 16.74,127.96 19.915,127.96 21.185,129.23 LCD2.31@23.09,129.23 ; LCD2.31@22.659,3.879 ccw(c21.619,2.839) 21.619,4.31 ccw(c21.619,5.781) LCD2.31@22.659,4.741 ; LCD2.31@22.659,45.519 ccw(c21.619,44.479) 21.619,45.95 ccw(c21.619,47.421) LCD2.31@22.659,46.381 ; LCD2.31@22.659,87.159 ccw(c21.619,86.119) 21.619,87.59 ccw(c21.619,89.061) LCD2.31@22.659,88.021 ; LCD2.31@22.659,128.799 ccw(c21.619,127.759) 21.619,129.23 ccw(c21.619,130.701) LCD2.31@22.659,129.661 ; LCD1.31@29.17,3.701 cw(c29.17,2.229) 30.21,3.27 cw(c31.251,4.31) LCD1.31@29.779,4.31 ; LCD1.31@29.17,4.31 30.44,3.04 33.615,3.04 34.885,4.31 LCD2.31@36.79,4.31 ; LCD1.31@29.17,45.34 cw(c29.17,43.869) 30.21,44.91 cw(c31.251,45.95) LCD1.31@29.779,45.95 ; LCD1.31@29.17,45.95 30.44,44.68 33.615,44.68 34.885,45.95 LCD2.31@36.79,45.95 ; LCD1.31@29.17,86.98 cw(c29.17,85.509) 30.21,86.55 cw(c31.251,87.59) LCD1.31@29.779,87.59 ; LCD1.31@29.17,87.59 30.44,86.32 33.615,86.32 34.885,87.59 LCD2.31@36.79,87.59 ; LCD1.31@29.17,128.62 cw(c29.17,127.149) 30.21,128.19 cw(c31.251,129.23) LCD1.31@29.779,129.23 ; LCD1.31@29.17,129.23 30.44,127.96 33.615,127.96 34.885,129.23 LCD2.31@36.79,129.23 ; LCD2.31@36.359,3.879 ccw(c35.319,2.839) 35.319,4.31 ccw(c35.319,5.781) LCD2.31@36.359,4.741 ; LCD2.31@36.359,45.519 ccw(c35.319,44.479) 35.319,45.95 ccw(c35.319,47.421) LCD2.31@36.359,46.381 ; LCD2.31@36.359,87.159 ccw(c35.319,86.119) 35.319,87.59 ccw(c35.319,89.061) LCD2.31@36.359,88.021 ; LCD2.31@36.359,128.799 ccw(c35.319,127.759) 35.319,129.23 ccw(c35.319,130.701) LCD2.31@36.359,129.661 ; LCD1.31@42.87,3.701 cw(c42.87,2.229) 43.91,3.27 cw(c44.951,4.31) LCD1.31@43.479,4.31 ; LCD1.31@42.87,4.31 44.14,3.04 47.315,3.04 48.585,4.31 LCD2.31@50.49,4.31 ; LCD1.31@42.87,45.34 cw(c42.87,43.869) 43.91,44.91 cw(c44.951,45.95) LCD1.31@43.479,45.95 ; LCD1.31@42.87,45.95 44.14,44.68 47.315,44.68 48.585,45.95 LCD2.31@50.49,45.95 ; LCD1.31@42.87,86.98 cw(c42.87,85.509) 43.91,86.55 cw(c44.951,87.59) LCD1.31@43.479,87.59 ; LCD1.31@42.87,87.59 44.14,86.32 47.315,86.32 48.585,87.59 LCD2.31@50.49,87.59 ; LCD1.31@42.87,128.62 cw(c42.87,127.149) 43.91,128.19 cw(c44.951,129.23) LCD1.31@43.479,129.23 ; LCD1.31@42.87,129.23 44.14,127.96 47.315,127.96 48.585,129.23 LCD2.31@50.49,129.23 ; LCD2.31@50.059,3.879 ccw(c49.019,2.839) 49.019,4.31 ccw(c49.019,5.781) LCD2.31@50.059,4.741 ; LCD2.31@50.059,45.519 ccw(c49.019,44.479) 49.019,45.95 ccw(c49.019,47.421) LCD2.31@50.059,46.381 ; LCD2.31@50.059,87.159 ccw(c49.019,86.119) 49.019,87.59 ccw(c49.019,89.061) LCD2.31@50.059,88.021 ; LCD2.31@50.059,128.799 ccw(c49.019,127.759) 49.019,129.23 ccw(c49.019,130.701) LCD2.31@50.059,129.661 ; LCD1.31@56.57,3.701 cw(c56.57,2.229) 57.61,3.27 cw(c58.651,4.31) LCD1.31@57.179,4.31 ; LCD1.31@56.57,4.31 57.84,3.04 61.015,3.04 62.285,4.31 LCD2.31@64.19,4.31 ; LCD1.31@56.57,45.34 cw(c56.57,43.869) 57.61,44.91 cw(c58.651,45.95) LCD1.31@57.179,45.95 ; LCD1.31@56.57,45.95 57.84,44.68 61.015,44.68 62.285,45.95 LCD2.31@64.19,45.95 ; LCD1.31@56.57,86.98 cw(c56.57,85.509) 57.61,86.55 cw(c58.651,87.59) LCD1.31@57.179,87.59 ; LCD1.31@56.57,87.59 57.84,86.32 61.015,86.32 62.285,87.59 LCD2.31@64.19,87.59 ; LCD1.31@56.57,128.62 cw(c56.57,127.149) 57.61,128.19 cw(c58.651,129.23) LCD1.31@57.179,129.23 ; LCD1.31@56.57,129.23 57.84,127.96 61.015,127.96 62.285,129.23 LCD2.31@64.19,129.23 ; LCD2.31@63.759,3.879 ccw(c62.719,2.839) 62.719,4.31 ccw(c62.719,5.781) LCD2.31@63.759,4.741 ; LCD2.31@63.759,45.519 ccw(c62.719,44.479) 62.719,45.95 ccw(c62.719,47.421) LCD2.31@63.759,46.381 ; LCD2.31@63.759,87.159 ccw(c62.719,86.119) 62.719,87.59 ccw(c62.719,89.061) LCD2.31@63.759,88.021 ; LCD2.31@63.759,128.799 ccw(c62.719,127.759) 62.719,129.23 ccw(c62.719,130.701) LCD2.31@63.759,129.661 ; LCD1.31@70.27,3.701 cw(c70.27,2.229) 71.31,3.27 cw(c72.351,4.31) LCD1.31@70.879,4.31 ; LCD1.31@70.27,4.31 71.54,3.04 74.715,3.04 75.985,4.31 LCD2.31@77.89,4.31 ; LCD1.31@70.27,45.34 cw(c70.27,43.869) 71.31,44.91 cw(c72.351,45.95) LCD1.31@70.879,45.95 ; LCD1.31@70.27,45.95 71.54,44.68 74.715,44.68 75.985,45.95 LCD2.31@77.89,45.95 ; LCD1.31@70.27,86.98 cw(c70.27,85.509) 71.31,86.55 cw(c72.351,87.59) LCD1.31@70.879,87.59 ; LCD1.31@70.27,87.59 71.54,86.32 74.715,86.32 75.985,87.59 LCD2.31@77.89,87.59 ; LCD1.31@70.27,128.62 cw(c70.27,127.149) 71.31,128.19 cw(c72.351,129.23) LCD1.31@70.879,129.23 ; LCD1.31@70.27,129.23 71.54,127.96 74.715,127.96 75.985,129.23 LCD2.31@77.89,129.23 ; LCD2.31@77.459,3.879 ccw(c76.419,2.839) 76.419,4.31 ccw(c76.419,5.781) LCD2.31@77.459,4.741 ; LCD2.31@77.459,45.519 ccw(c76.419,44.479) 76.419,45.95 ccw(c76.419,47.421) LCD2.31@77.459,46.381 ; LCD2.31@77.459,87.159 ccw(c76.419,86.119) 76.419,87.59 ccw(c76.419,89.061) LCD2.31@77.459,88.021 ; LCD2.31@77.459,128.799 ccw(c76.419,127.759) 76.419,129.23 ccw(c76.419,130.701) LCD2.31@77.459,129.661 ; LCD1.31@83.97,3.701 cw(c83.97,2.229) 85.01,3.27 cw(c86.051,4.31) LCD1.31@84.579,4.31 ; LCD1.31@83.97,4.31 85.24,3.04 88.415,3.04 89.685,4.31 LCD2.31@91.59,4.31 ; LCD1.31@83.97,45.34 cw(c83.97,43.869) 85.01,44.91 cw(c86.051,45.95) LCD1.31@84.579,45.95 ; LCD1.31@83.97,45.95 85.24,44.68 88.415,44.68 89.685,45.95 LCD2.31@91.59,45.95 ; LCD1.31@83.97,86.98 cw(c83.97,85.509) 85.01,86.55 cw(c86.051,87.59) LCD1.31@84.579,87.59 ; LCD1.31@83.97,87.59 85.24,86.32 88.415,86.32 89.685,87.59 LCD2.31@91.59,87.59 ; LCD1.31@83.97,128.62 cw(c83.97,127.149) 85.01,128.19 cw(c86.051,129.23) LCD1.31@84.579,129.23 ; LCD1.31@83.97,129.23 85.24,127.96 88.415,127.96 89.685,129.23 LCD2.31@91.59,129.23 ; LCD2.31@91.159,3.879 ccw(c90.119,2.839) 90.119,4.31 ccw(c90.119,5.781) LCD2.31@91.159,4.741 ; LCD2.31@91.159,45.519 ccw(c90.119,44.479) 90.119,45.95 ccw(c90.119,47.421) LCD2.31@91.159,46.381 ; LCD2.31@91.159,87.159 ccw(c90.119,86.119) 90.119,87.59 ccw(c90.119,89.061) LCD2.31@91.159,88.021 ; LCD2.31@91.159,128.799 ccw(c90.119,127.759) 90.119,129.23 ccw(c90.119,130.701) LCD2.31@91.159,129.661 ; LCD1.31@97.67,3.701 cw(c97.67,2.229) 98.71,3.27 cw(c99.751,4.31) LCD1.31@98.279,4.31 ; LCD1.31@97.67,4.31 98.94,3.04 102.115,3.04 103.385,4.31 LCD2.31@105.29,4.31 ; LCD1.31@97.67,45.34 cw(c97.67,43.869) 98.71,44.91 cw(c99.751,45.95) LCD1.31@98.279,45.95 ; LCD1.31@97.67,45.95 98.94,44.68 102.115,44.68 103.385,45.95 LCD2.31@105.29,45.95 ; LCD1.31@97.67,86.98 cw(c97.67,85.509) 98.71,86.55 cw(c99.751,87.59) LCD1.31@98.279,87.59 ; LCD1.31@97.67,87.59 98.94,86.32 102.115,86.32 103.385,87.59 LCD2.31@105.29,87.59 ; LCD1.31@97.67,128.62 cw(c97.67,127.149) 98.71,128.19 cw(c99.751,129.23) LCD1.31@98.279,129.23 ; LCD1.31@97.67,129.23 98.94,127.96 102.115,127.96 103.385,129.23 LCD2.31@105.29,129.23 ; LCD2.31@104.859,3.879 ccw(c103.819,2.839) 103.819,4.31 ccw(c103.819,5.781) LCD2.31@104.859,4.741 ; LCD2.31@104.859,45.519 ccw(c103.819,44.479) 103.819,45.95 ccw(c103.819,47.421) LCD2.31@104.859,46.381 ; LCD2.31@104.859,87.159 ccw(c103.819,86.119) 103.819,87.59 ccw(c103.819,89.061) LCD2.31@104.859,88.021 ; LCD2.31@104.859,128.799 ccw(c103.819,127.759) 103.819,129.23 ccw(c103.819,130.701) LCD2.31@104.859,129.661 ; LCD1.31@111.37,3.701 cw(c111.37,2.229) 112.41,3.27 cw(c113.451,4.31) LCD1.31@111.979,4.31 ; LCD1.31@111.37,4.31 112.64,3.04 115.815,3.04 117.085,4.31 LCD2.31@118.99,4.31 ; LCD1.31@111.37,45.34 cw(c111.37,43.869) 112.41,44.91 cw(c113.451,45.95) LCD1.31@111.979,45.95 ; LCD1.31@111.37,45.95 112.64,44.68 115.815,44.68 117.085,45.95 LCD2.31@118.99,45.95 ; LCD1.31@111.37,86.98 cw(c111.37,85.509) 112.41,86.55 cw(c113.451,87.59) LCD1.31@111.979,87.59 ; LCD1.31@111.37,87.59 112.64,86.32 115.815,86.32 117.085,87.59 LCD2.31@118.99,87.59 ; LCD1.31@111.37,128.62 cw(c111.37,127.149) 112.41,128.19 cw(c113.451,129.23) LCD1.31@111.979,129.23 ; LCD1.31@111.37,129.23 112.64,127.96 115.815,127.96 117.085,129.23 LCD2.31@118.99,129.23 ; LCD2.31@118.559,3.879 ccw(c117.519,2.839) 117.519,4.31 ccw(c117.519,5.781) LCD2.31@118.559,4.741 ; LCD2.31@118.559,45.519 ccw(c117.519,44.479) 117.519,45.95 ccw(c117.519,47.421) LCD2.31@118.559,46.381 ; LCD2.31@118.559,87.159 ccw(c117.519,86.119) 117.519,87.59 ccw(c117.519,89.061) LCD2.31@118.559,88.021 ; LCD2.31@118.559,128.799 ccw(c117.519,127.759) 117.519,129.23 ccw(c117.519,130.701) LCD2.31@118.559,129.661 ; LCD1.31@125.07,3.701 cw(c125.07,2.229) 126.11,3.27 cw(c127.151,4.31) LCD1.31@125.679,4.31 ; LCD1.31@125.07,4.31 126.34,3.04 129.515,3.04 130.785,4.31 LCD2.31@132.69,4.31 ; LCD1.31@125.07,45.34 cw(c125.07,43.869) 126.11,44.91 cw(c127.151,45.95) LCD1.31@125.679,45.95 ; LCD1.31@125.07,45.95 126.34,44.68 129.515,44.68 130.785,45.95 LCD2.31@132.69,45.95 ; LCD1.31@125.07,86.98 cw(c125.07,85.509) 126.11,86.55 cw(c127.151,87.59) LCD1.31@125.679,87.59 ; LCD1.31@125.07,87.59 126.34,86.32 129.515,86.32 130.785,87.59 LCD2.31@132.69,87.59 ; LCD1.31@125.07,128.62 cw(c125.07,127.149) 126.11,128.19 cw(c127.151,129.23) LCD1.31@125.679,129.23 ; LCD1.31@125.07,129.23 126.34,127.96 129.515,127.96 130.785,129.23 LCD2.31@132.69,129.23 ; LCD2.31@132.259,3.879 ccw(c131.219,2.839) 131.219,4.31 ccw(c131.219,5.781) LCD2.31@132.259,4.741 ; LCD2.31@132.259,45.519 ccw(c131.219,44.479) 131.219,45.95 ccw(c131.219,47.421) LCD2.31@132.259,46.381 ; LCD2.31@132.259,87.159 ccw(c131.219,86.119) 131.219,87.59 ccw(c131.219,89.061) LCD2.31@132.259,88.021 ; LCD2.31@132.259,128.799 ccw(c131.219,127.759) 131.219,129.23 ccw(c131.219,130.701) LCD2.31@132.259,129.661